# Altium PCB Expand_Board.PcbDoc
Units mil, origin at the board's own origin, x right, y up, seen from the top; angles counter-clockwise.
Board outline 6000 x 4000 mil, 2 copper layers (Top Layer, Bottom Layer); 51 components, 44 nets, 214 pads, 35 vias.
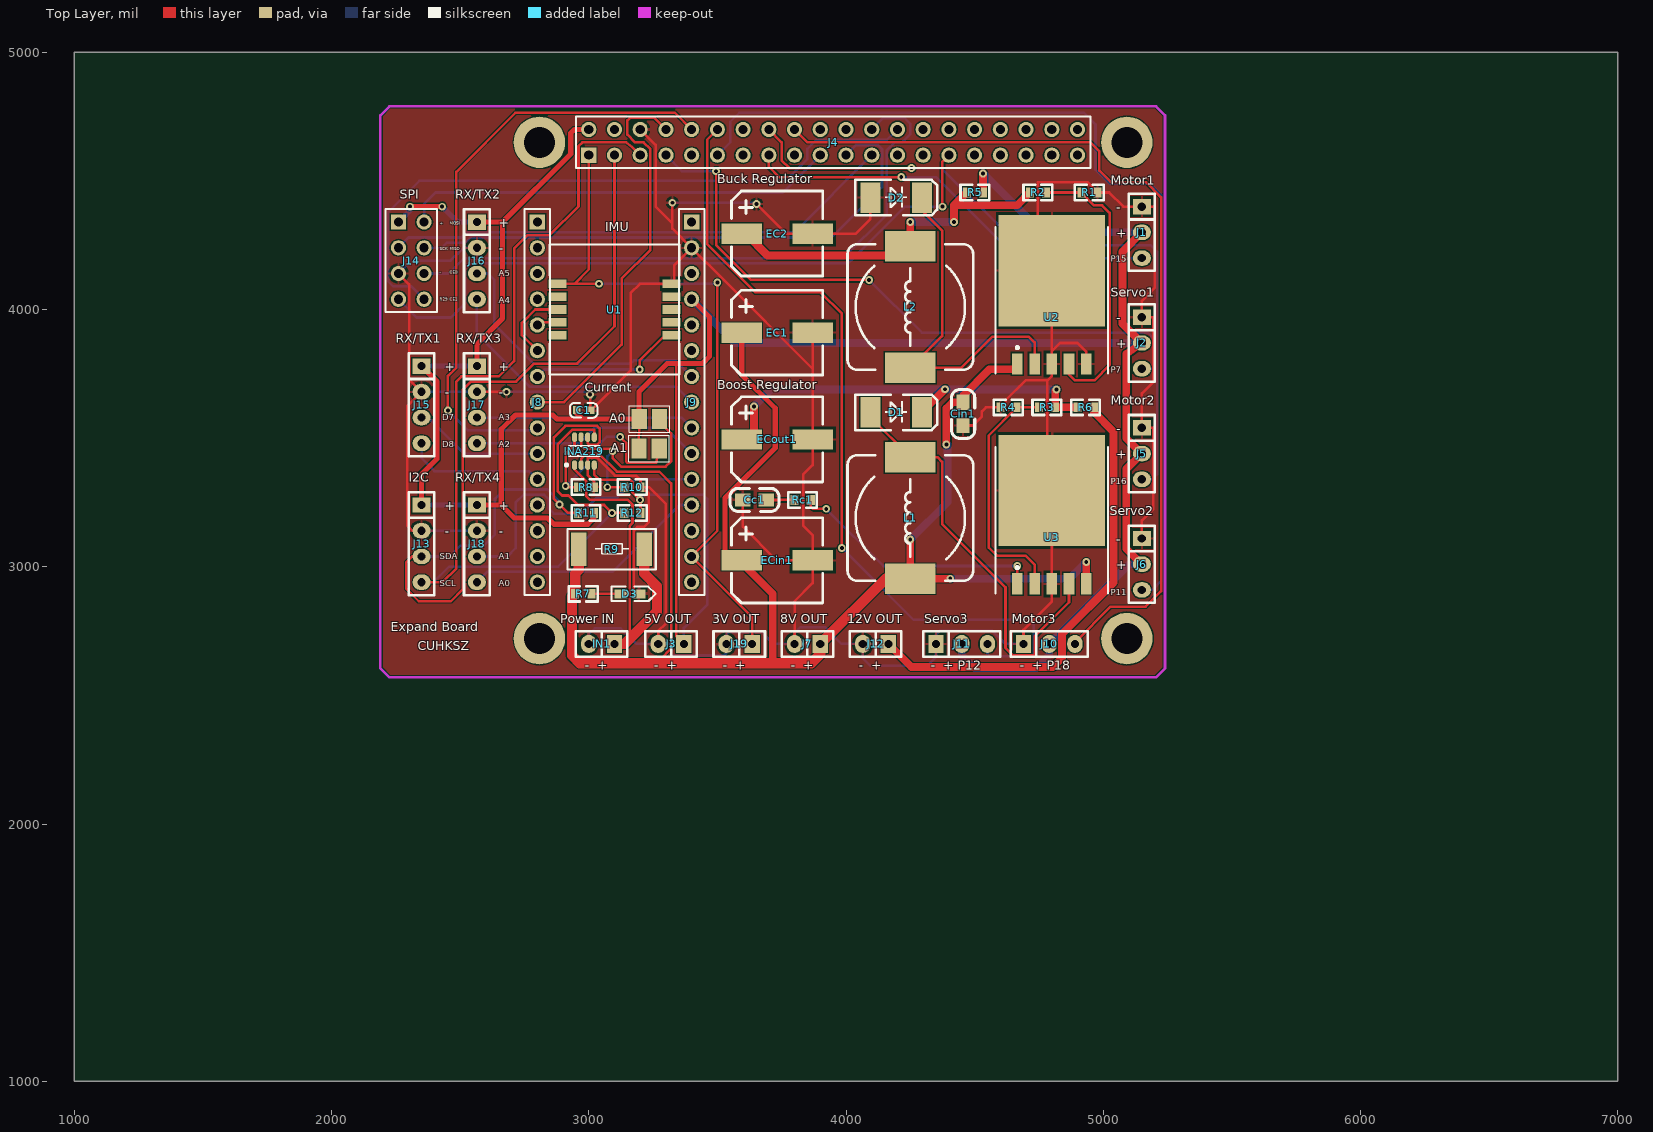
[diagram p0: Top Layer view]
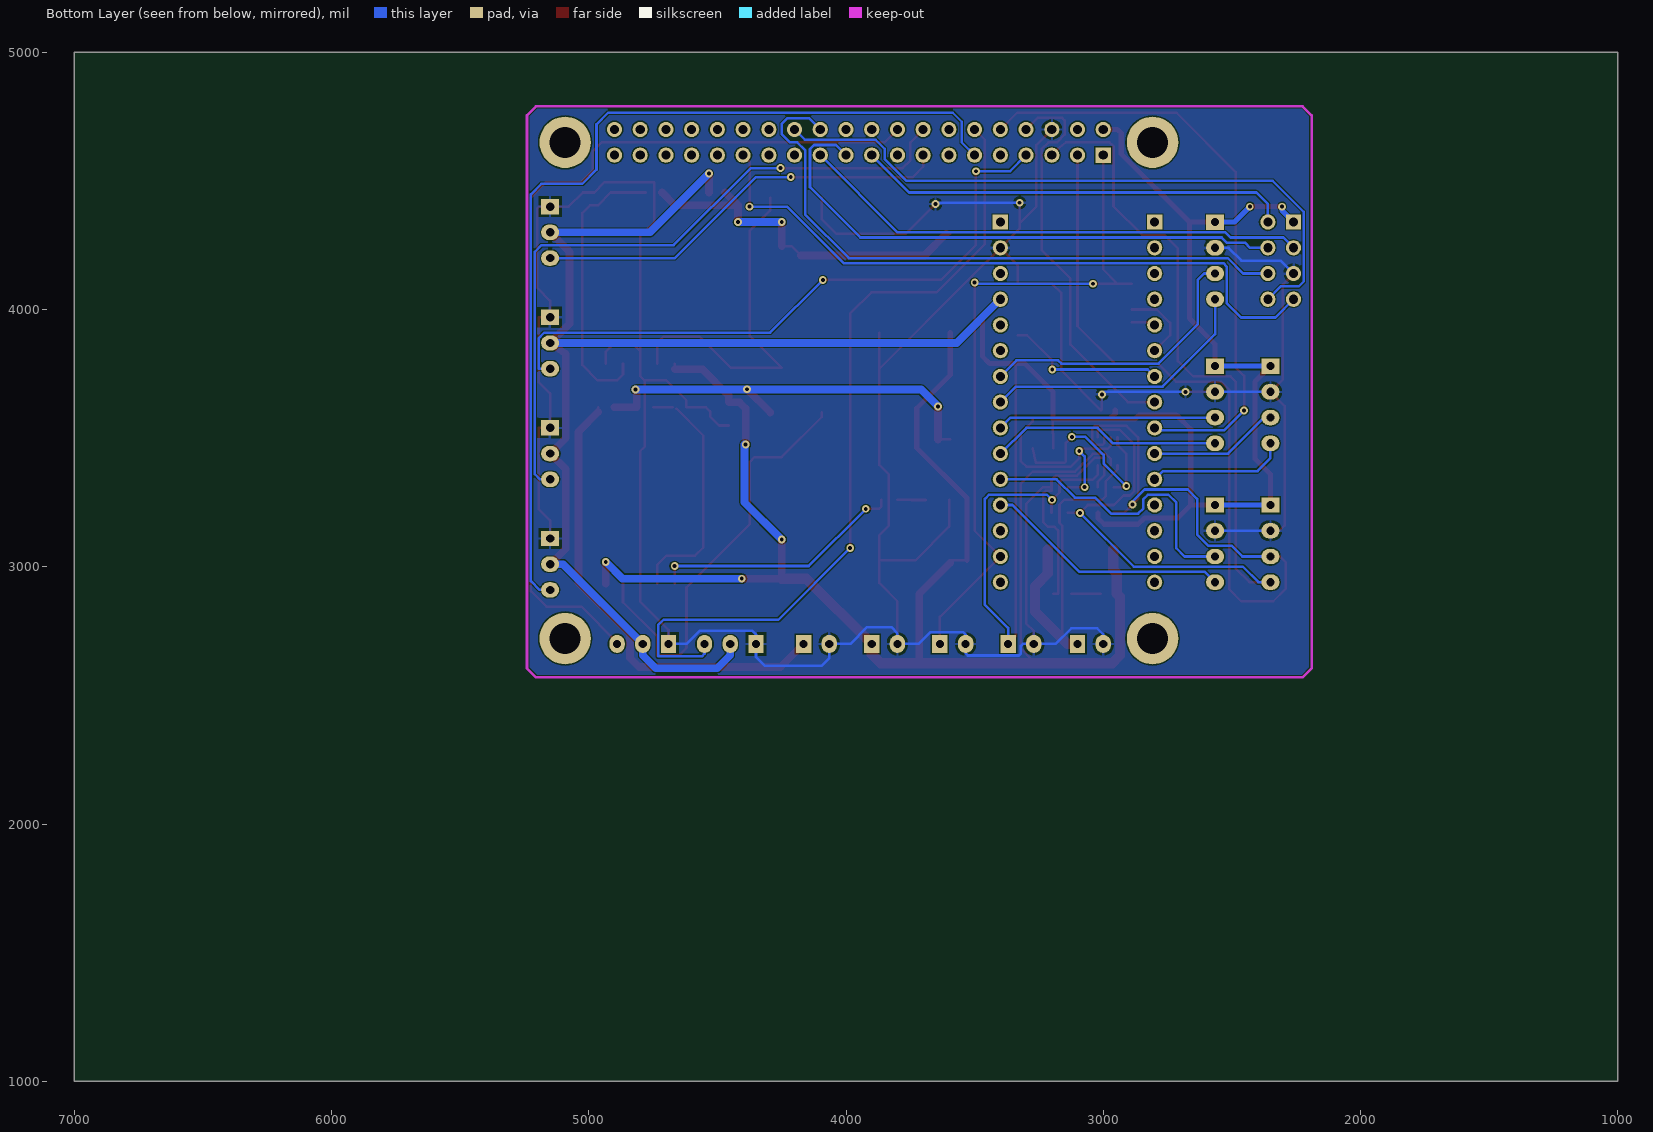
[diagram p1: Bottom Layer view, seen from below]

## Layer stack, top to bottom
Top Solder: solder mask 0.4, Solder Resist, Dk 3.5
Top Layer: signal copper 1.4
Dielectric 1: dielectric 12.6, FR-4, Dk 4.8
Bottom Layer: signal copper 1.4
Bottom Solder: solder mask 0.4, Solder Resist, Dk 3.5

## Board outline
1000,1000 7000,1000 7000,5000 1000,5000

## Design rules (kind name [scope] priority, off if disabled: settings)
Clearance [All] p1: gap=5
PolygonConnect [All] p1: connectstyle=Relief reliefconductorwidth=10 reliefentries=4 polygonreliefangle="90 Angle" airgapwidth=10
RoomDefinition Expand_Board [InComponentClass('Expand_Board')] p1: confinementstyle=ConfineIn formatcopy=TRUE lockcomponents=FALSE outline 2190,2570 5240,2570 5240,4790 2190,4790
RoutingVias [All] p1: holewidth=28 width=50 viastyle="Through Hole" minholewidth=28 minwidth=50 maxholewidth=28 maxwidth=50
SolderMaskExpansion [All] p1: expansion=4
Width [All] p1: maxlimit=50 minlimit=10 preferedwidth=10
30 further rules are at their usual default settings.

## Components (designator, comment, footprint, x,y, rotation, side; value= is the part's Value field where it differs from the comment)
A0 "Switch_A0" TSOP65P180X145-2N 3235.31,3574 r0 top
A1 "Switch_A1" TSOP65P180X145-2N 3234.37,3460 r0 top
C1 "CAP1uF" 0603C 2953.04,3609.39 r0 top
Cc1 "CAP0.47uF" 0805C 3600,3260 r0 top
Cin1 "CAP 0.1uF" 0805C 4455,3550 r90 top
D1 "DIODE SCHOTTKY 1N5820" SMA/DO-214AC 4100,3600 r0 top
D2 "DIODE 5A  40V" SMA/DO-214AC 4100,4435 r0 top
D3 "LED" LED-0603B 3125,2894.74 r0 top
EC1 "Cin 470uF 50V" SMD-EC8X8X10 3865,3915 r0 top
EC2 "Cout  220uF 35V" SMD-EC8X8X10 3865,4300 r0 top
ECin1 "SMD_ECAP  100uF   25V" SMD-EC8X8X10 3865,3030 r0 top
ECout1 "SMD_ECAP  680uF    16V" SMD-EC8X8X10 3865,3500 r0 top
IN1 "Power In" "Pin HDR1X2/2.54mm-S" 3100,2700 r270 top
INA219 "INA219" INA219 2983.04,3449.39 r90 top
J1 "Motor1" "Pin HDR1X3/2.54mm-S" 5150,4400 r0 top
J2 "Servo1" "Pin HDR1X3/2.54mm-S" 5150,3970 r0 top
J3 "Power 5V" "Pin HDR1X2/2.54mm-S" 3370,2700 r270 top
J4 "Raspberry Pi" "Pin HDR2X20/2.54mm-S" 3000,4600 r0 top
J5 "Motor2" "Pin HDR1X3/2.54mm-S" 5150,3540 r0 top
J6 "Servo2" "Pin HDR1X3/2.54mm-S" 5150,3110 r0 top
J7 "Power 8V" "Pin HDR1X2/2.54mm-S" 3900,2700 r270 top
J8 "Arduino 0~12" "Pin HDR1X15/2.54mm-S" 2800,4340 r270 top
J9 "Arduino 13~19" "Pin HDR1X15/2.54mm-S" 3400,4340 r270 top
J10 "Motor3" "Pin HDR1X3/2.54mm-S" 4690,2700 r90 top
J11 "Servo3" "Pin HDR1X3/2.54mm-S" 4350,2700 r90 top
J12 "Power 12V" "Pin HDR1X2/2.54mm-S" 4165,2700 r270 top
J13 "I2C" "Pin HDR1X4/2.54mm-S" 2350,3240 r0 top
J14 "SPI" "Pin HDR2X4/2.54mm-S" 2260,4340 r270 top
J15 "RX/TX1" "Pin HDR1X4/2.54mm-S" 2350,3780 r0 top
J16 "RX/TX2" "Pin HDR1X4/2.54mm-S" 2565,4340 r0 top
J17 "RX/TX3" "Pin HDR1X4/2.54mm-S" 2565,3780 r0 top
J18 "RX/TX4" "Pin HDR1X4/2.54mm-S" 2565,3240 r0 top
J19 "Small Power 3V" "Pin HDR1X2/2.54mm-S" 3635,2700 r270 top
L1 "INDUCTOR CD127-68UH 680" CDRH127 4250,3190 r90 top
L2 "INDUCTOR   68uH" CDRH127 4250,4010 r90 top
R1 "RES1k" 0603R 4915,4455 r0 top
R2 "RES 10k" 0603R 4715,4455 r0 top
R3 "RES 48.7k" 0603R 4750,3620 r0 top
R4 "RES  5.62k" 0603R 4600,3620 r0 top
R5 "RES 0Ω" 0603R 4470,4455 r0 top
R6 "RES 0Ω" 0603R 4900,3620 r0 top
R7 "RES 800" 0603R 3010,2895 r180 top
R8 "RES10k" 0603R 2958.04,3309.39 r0 top
R9 "RES0.1" 2512R 3213.04,3069.39 r180 top
R10 "RES10k" 0603R 3138.04,3309.39 r0 top
R11 "RES10k" 0603R 2958.04,3209.39 r0 top
R12 "RES10k" 0603R 3138.04,3209.39 r0 top
Rc1 "RES 2k" 0603R 3800,3260 r0 top
U1 "HI219M_IMU" SON127P1220X265-10N 3100,4000 r0 top
U2 "LM2596S-ADJ" TO-263-5 4800,3955 r0 top
U3 "LM2587S-ADJ" TO-263-5 4800,3100 r0 top

## Footprints (in the part's own frame and the unit in brackets; to place one, negate y for a bottom-side part, rotate by r counter-clockwise, add the part's x,y. Pads: shape width x height; smd on the part's side, far side on the other; paste and mask are expansions set on the pad)
0603C [mil]
  rect 30x30 smd: 1(0.21,-0.35) 2(55.21,-1.35)
  silkscreen extent -26,-30 81,28, body extent -1,-15 62,17, height 12
0603R [mm]
  rect 0.8x0.965 smd: 1(0,0) 2(1.6,0)
  silkscreen extent -0.64,-0.76 2.21,0.76, body extent -0.04,-0.41 1.56,0.41, height 0.45
0805C [mil]
  rect 60x50 smd: 1(-0.71,-0.4) 2(89.29,-0.4)
  silkscreen extent -51,-45 139,45, body extent 6,-25 84,25, height 31
2512R [mil]
  rect 61x129.92 smd: 1(-3.11,2) 2(251.89,2)
  silkscreen extent -47,-77 296,81, body extent 0,-63 249,63, height 24
CDRH127 [mm] "12*12*8mm（长宽高）"
  rect 3x5 smd: 1(-6,0) 2(6,0)
  silkscreen extent -6.2,-6.2 6.2,6.2, body extent -5.87,-6.03 6.13,5.97, height 7.8
INA219 [mm] "TSOP, 8-Leads, Body 2.90x1.60mm, Pitch 0.65mm, IPC Medium Density"
  oval 0.95x0.5 smd: 1(-1.375,0.975) 2(-1.375,0.325) 3(-1.375,-0.325) 4(-1.375,-0.975) 5(1.375,-0.975) 6(1.375,-0.325) 7(1.375,0.325) 8(1.375,0.975)
  silkscreen extent -1.5,-1.5 0.5,1.9, body extent -0.9,-1.5 0.9,1.5, height 1.45
LED-0603B [mil]
  rect 50x35 smd: A(0,0.26) K(70,0.26)
  silkscreen extent -36,-28 135,28, body extent 4,-15 66,17, height 24
"Pin HDR1X2/2.54mm-S" [mil]
  rect 70x60 hole 32: 1(0,0)
  oval 70x60 hole 32: 2(0,-100)
  silkscreen extent -50,-150 50,50, body extent -50,-150 50,50, height 336
"Pin HDR1X3/2.54mm-S" [mil]
  rect 70x60 hole 32: 1(0,0)
  oval 70x60 hole 32: 2(0,-100) 3(0,-200)
  silkscreen extent -50,-250 50,50, body extent -50,-250 50,50, height 336
"Pin HDR1X4/2.54mm-S" [mil]
  rect 70x60 hole 32: 1(0,0)
  oval 70x60 hole 32: 2(0,-100) 3(0,-200) 4(0,-300)
  silkscreen extent -50,-350 50,50, body extent -50,-350 50,50, height 336
"Pin HDR1X15/2.54mm-S" [mm] "Connector; Header; 15 Position"
  rect 1.5x1.5 hole 0.9: 1(0,0)
  round 1.5 hole 0.9: 2(2.54,0) 3(5.08,0) 4(7.62,0) 5(10.16,0) 6(12.7,0) 7(15.24,0) 8(17.78,0) 9(20.32,0) 10(22.86,0) 11(25.4,0) 12(27.94,0) 13(30.48,0) 14(33.02,0) 15(35.56,0)
  silkscreen extent -1.27,-1.27 36.83,1.27, body extent -1.27,-1.27 36.83,1.27, height 7.58
"Pin HDR2X4/2.54mm-S" [mm] "Connector; Header; 4x2 Position"
  rect 1.5x1.5 hole 0.9: 1(0,0)
  round 1.5 hole 0.9: 2(0,2.54) 3(2.54,0) 4(2.54,2.54) 5(5.08,0) 6(5.08,2.54) 7(7.62,0) 8(7.62,2.54)
  silkscreen extent -1.27,-1.27 8.89,3.81, body extent -1.27,-1.27 8.89,3.81, height 7.58
"Pin HDR2X20/2.54mm-S" [mm] "Connector; Header; 20x2 Position"
  rect 1.5x1.5 hole 0.9: 1(0,0)
  round 1.5 hole 0.9: 2(0,2.54) 3(2.54,0) 4(2.54,2.54) 5(5.08,0) 6(5.08,2.54) 7(7.62,0) 8(7.62,2.54) 9(10.16,0) 10(10.16,2.54) 11(12.7,0) 12(12.7,2.54) 13(15.24,0) 14(15.24,2.54) 15(17.78,0) 16(17.78,2.54) 17(20.32,0) 18(20.32,2.54) 19(22.86,0) 20(22.86,2.54) 21(25.4,0) 22(25.4,2.54) 23(27.94,0) 24(27.94,2.54) 25(30.48,0) 26(30.48,2.54) 27(33.02,0) 28(33.02,2.54) 29(35.56,0) 30(35.56,2.54) 31(38.1,0) 32(38.1,2.54) 33(40.64,0) 34(40.64,2.54) 35(43.18,0) 36(43.18,2.54) 37(45.72,0) 38(45.72,2.54) 39(48.26,0) 40(48.26,2.54)
  silkscreen extent -1.27,-1.27 49.53,3.81, body extent -1.27,-1.27 49.53,3.81, height 7.58
SMA/DO-214AC [mm] "塑封二极管"
  rect 2x3 smd: A(-0.127,0) K(4.953,0)
  silkscreen extent -1.63,-1.75 6.48,1.75, body extent 0.11,-1.35 4.71,1.35, height 2.4
SMD-EC8X8X10 [mm]
  rect 4x2 smd: 1(-6.858,-0.127) 2(0.142,-0.127)
  silkscreen extent -7.88,-4.32 1.12,4.08, body extent -8.38,-4.28 1.52,4.02, height 10.2
SON127P1220X265-10N [mm] "SON, 10-Leads, Body 12.25x12.25mm, Pitch 1.27mm, IPC Medium Density"
  rect 1.8x0.85 smd: 1(-5.63,2.54) 2(-5.63,1.27) 3(-5.63,0) 4(-5.63,-1.27) 5(-5.63,-2.54) 6(5.63,-2.54) 7(5.63,-1.27) 8(5.63,0) 9(5.63,1.27) 10(5.63,2.54)
  silkscreen extent -6.4,-6.4 6.4,6.4, body extent -6.25,-6.25 6.25,6.25, height 2.65
TO-263-5 [mm] "贴片LM2596"
  rect 1.05x2.1 smd: 1(-3.4,-4.225) 2(-1.7,-4.225) 3(0,-4.225) 4(1.7,-4.225) 5(3.4,-4.225)
  rect 10.5x11 smd: 6(0,4.987)
  silkscreen extent -5.55,-5.18 5.55,9.28, body extent -5.33,-4.7 5.33,10.29, height 3
TSOP65P180X145-2N [mm] "TSOP, 2-Leads, Body 1.00x0.15mm, Pitch 0.65mm, IPC Medium Density"
  rect 1.5x2 smd: 1(-1,0) 2(1,0)
  silkscreen extent -2,-1.3 2,1.3

## Part data
A0 A1 U1: library part Component_1
C1 Cc1 Cin1: library part CAP, "无极性电容"
D1 D2: library part "DIODE SCHOTTKY", "肖特基二极管"
EC1 EC2 ECin1 ECout1: library part SMD_ECAP, "贴片电解电容"
IN1 J3 J7 J12 J19: library part "Pin HDR1X2"
J1 J2 J5 J6 J10 J11: library part "Pin HDR1X3"
J4: library part "Pin HDR2X20"
J8 J9: library part "Pin HDR1X15"
J13 J15 J16 J17 J18: library part "Pin HDR1X4"
J14: library part "Pin HDR2X4"
L1 L2: library part INDUCTOR, "INDUCTOR"
R1 R2 R3 R4 R5 R6 R7 R8 R9 R10 R11 R12 Rc1: library part RES
U2: "可调稳压芯片"
U3: library part LM2577S-ADJ, "DC升压"

## Free pads (board coordinates)
  round 200 hole 120: 0(2808.27,2720.87) 0(2808.27,4650) 0(5091.73,2720.87) 0(5091.73,4650)

## Via types
v1: diameter 30, hole 15, Top Layer to Bottom Layer, 35 vias

## Nets (pads, with @x,y where several pads share a name; then routed paths per layer and width w, separated by ;. In a path a pad name is that pad's centre, name@x,y a point inside that pad or via, vN(x,y) a via of type N, cw(c..) or ccw(c..) an arc to the next point about the centre after c; other vN are vias at no path point)
A0: A0.2 INA219.7 R10.1 | length 838.8
  Top Layer w10: INA219.7 2970.24,3471.01 2983.25,3458 3085,3458 v1(3093,3450) 3093,3422 3125.87,3389.13 3299.13,3389.13 3320,3410 3320,3518.69 3274.69,3564 A0.2 ; v1(3072.39,3309.39) R10.1
  Bottom Layer w10: v1(3072.39,3309.39) 3072.39,3429.39 v1(3093,3450)
A1: A1.2 INA219.8 R8.1 | length 845
  Top Layer w10: INA219.8 2944.65,3472.5 2910,3437.85 v1(2910,3313.79) 2914.39,3309.39 R8.1 ; v1(3122,3505) 3145,3482 3145,3410 3150,3405 3262.89,3405 A1.2
  Bottom Layer w10: v1(2910,3313.79) 2910.79,3313.79 2998.71,3401.71 2998.71,3434.63 3069.09,3505 v1(3122,3505)
CE0: J4.24 J14.6 | length 2477.1
  Bottom Layer w10: J14.6 2456,4140 2516,4200 3989,4200 4159,4370 4159,4619.47 4189.53,4650 4217.53,4650 4250,4682.47 4250,4721 4227,4744 4144,4744 J4.24
CE1: J4.26 J14.8 | length 2573.4
  Bottom Layer w10: J14.8 2310,4090 2240,4090 2220.47,4109.53 2220.47,4379.53 2340.94,4500 3764,4500 3850,4586 3850,4625 3885,4660 4160,4660 J4.26
GND: C1.2 Cc1.1 Cin1.1 D2.A D3.K EC1.2 EC2.2 ECin1.2 ECout1.2 IN1.2 INA219.3 J1.1 J2.1 J3.2 J4.6 J5.1 J6.1 J7.2 J9.2 J10.1 J11.1 J12.2 J13.2 J14.5 J15.2 J16.2 J17.2 J18.2 J19.2 R1.2 R4.1 R8.2 R10.2 U1.10 U2.3 U2.5 U2.6 U3.3 U3.6 | length 15384.4
  Top Layer w10: J14.5 2302,4098 2302,3728 J15.2 2295,3625 2295,3160 2315,3140 J13.2 ; J17.2 v1(2680,3680) ; v1(3005,3670) 3005,3611.29 C1.2 3163,3762.79 3163,4064 3199,4100 U1.10 3331.65,4100 3331.65,4171.65 J9.2 ; R8.2 3021.03,3330.8 2995.84,3356 2995.84,3422.38 2997.42,3423.96 3032,3423.96 3101.96,3354 3184.03,3354 3201.03,3337 R10.2 ; D3.K 3175,2895 3175,3141 3189,3155 3215,3155 3234,3174 3234,3285.4 3224,3295.4 3201.03,3295.4 R10.2 ; J4.6 3260,4640 3260,4400 3325,4335 ; J3.2 3270,2750 3300,2780 3300,3243.39 3234,3309.39 R10.2 ; v1(3325,4415) 3325,4335 ; Cc1.1 3599.29,3155.71 3730,3025 ECin1.2 ; v1@3650,4412 v1(3652,4410) 3767,4295 EC2.2 4038,4295 4095,4352 D2.A ; J7.2 3800,2866 3870.59,2936.59 ECin1.2 ; 3870.59,3774.41 EC1.2 ; Cin1.1 4493.29,3549.29 4528,3584 4528,3604 4544,3620 R4.1 4621,3620 4621,3648 4698,3725 4783,3725 4800,3740.7 ; J10.1 4690,2755 4800,2865 U3.3 U3.6 4800,3449 4783,3466 4783,3723.7 4800,3740.7 ; U2.5 4933.86,3836.14 4900,3870 4832,3870 4800,3838 ; J6.1 5150,3180 5195,3225 5195,3540 J5.1 5150,3674 5195,3719 5195,3970 J2.1 5150,4034 5201,4085 5201,4392 5193,4400 J1.1 5078,4400 5023,4455 R1.2 4937.99,4495 4745,4495 4745,4341 4800,4286 U2.6 4800,3838 ; 3325,4335 3325,4315 J9.2 ; J9.2 3510,4130 3510.36,4130 3870.59,3769.77 3870.59,3395.59 3833,3358 3833,3160.59 3870.59,3123 ECin1.2 ; 4800,3740.7 U2.3 4800,3838
  Bottom Layer w10: J14.5 2310,4190 2463,4190 2513,4240 J16.2 ; J13.2 J18.2 ; J15.2 J17.2 ; v1(2680,3680) 2995,3680 v1(3005,3670) ; IN1.2 3000,2737 3024,2761 3124,2761 3185,2700 J3.2 3312,2700 3320,2692 3320,2663 3328,2655 3526,2655 3535,2664 J19.2 3535,2736 3544,2745 3673,2745 3718,2700 J7.2 3800,2741 3824,2765 3918,2765 3983,2700 J12.2 4065,2645 4095,2615 4315,2615 4350,2650 J11.1 4350,2736 4366,2752 4568,2752 4620,2700 J10.1 ; v1(3325,4415) 3647,4415 v1(3652,4410)
MISO: J4.21 J14.4 | length 2188.6
  Bottom Layer w10: J14.4 2429,4240 2449,4260 2520,4260 2540,4280 3944,4280 4140,4476 4140,4624 4124.47,4639.53 4039.53,4639.53 J4.21
MOSI: J4.19 J14.2 | length 1688.7
  Bottom Layer w10: J14.2 2360,4410 2405,4455 3755,4455 J4.19
MOTOR1: J1.3 J4.15 | length 1642
  Top Layer w10: J4.15 3700,4555 3740,4515 v1(4215,4515)
  Bottom Layer w10: v1(4215,4515) 4350,4515 4665,4200 J1.3
MOTOR2: J4.16 J5.3 | length 2680.5
  Top Layer w10: J4.16 3750,4650 3750,4580 3780,4550 v1(4255,4550)
  Bottom Layer w10: v1(4255,4550) 4370,4550 4670,4250 5184,4250 5210,4224 5210,3360 5190,3340 J5.3
MOTOR3: J4.18 J10.3 | length 3532.7
  Top Layer w10: J4.18 3850,4650 4950,4650 4985,4615 4985,4540 5030,4495 5166,4495 5225,4436 5225,2905 5165,2845 5029,2845 4890,2706 J10.3
NetCc1_2: Cc1.2 Rc1.1 | length 110.9
  Top Layer w10: Cc1.2 3744,3259.6 3744.4,3260 Rc1.1
NetD1_A: D1.A L1.2 U3.4 | length 1654
  Top Layer w10: D1.A 4095,3581.22 L1.2 4355.78,3426.22 4374,3408 4374,3166 4620,2920 4620,2685 4650,2655 4733,2655 4733,2728.07 4866.93,2862 U3.4
NetD2_K: D2.K L2.1 U2.2 | length 1371
  Top Layer w10: D2.K 4295,4385 4373.43,4306.57 4373.43,3897.21 L2.1 4448.78,3773.78 4570,3895 4710.07,3895 4733.07,3872 U2.2
NetD3_A: D3.A R7.1 | length 115
  Top Layer w10: R7.1 D3.A
NetR1_1: R1.1 R2.2 U2.4 | length 1104.4
  Top Layer w10: R2.2 R1.1 4965,4405 4996,4405 5025,4376 5025,3784 4966,3725 4890,3725 4866.93,3748.07 U2.4
NetR3_1: R3.1 R4.2 U3.2 | length 939.7
  Top Layer w10: R4.2@4659.81,3614.81 4555,3510 4555,3075 4586.38,3043.62 4697.45,3043.62 4733.07,3008 U3.2 ; R4.2@4673.66,3620 R3.1
NetRc1_2: Rc1.2 U3.1 | length 994.2
  Top Layer w10: Rc1.2 3862.99,3234.01 3872,3225 v1(3923,3225) ; U3.1 v1(4666.14,3003)
  Bottom Layer w10: v1(3923,3225) 4145,3003 v1(4666.14,3003)
RST_IMU: J8.7 U1.6 | length 618.4
  Top Layer w10: v1(3198,3767) 3198,3802 3296,3900 U1.6@3331.65,3900
  Bottom Layer w10: J8.7 2827,3767 v1(3198,3767)
RST_SPI: J4.29 J14.7 | length 2616.5
  Top Layer w10: v1(4375,4400) 4375,4575 J4.29
  Bottom Layer w10: J14.7 2331,3969 2464,3969 2520,4025 2520,4167 2533,4180 4009,4180 4229,4400 v1(4375,4400)
RX1: J8.11 J15.4 | length 542
  Bottom Layer w10: J15.4 2350,3422 2400,3372 2768,3372 J8.11
RX2: J9.8 J16.4 | length 1100.4
  Bottom Layer w10: J16.4 2565,3904 2769,3700 3340,3700 J9.8 J9.8@3420,3640
RX3: J9.10 J17.4 | length 921.3
  Bottom Layer w10: J17.4 2962,3480 3022,3540 3298.69,3540 3398.69,3440 J9.10 J9.10@3420,3440
RX4: J9.12 J18.4 | length 979.3
  Bottom Layer w10: J18.4 2605,2980 3093,2980 3353,3240 J9.12 J9.12@3420,3240
RXD_IMU: J8.6 U1.3 | length 302.7
  Top Layer w10: J8.6 2740,3900 2740,3948 2792,4000 U1.3@2888.35,4000
RXD_PI: J4.10 J8.9 | length 2361.9
  Top Layer w10: v1(2452.5,3607.5) 2452.5,3742.5 2485,3775 2485,4535 2715,4765 3335,4765 J4.10
  Bottom Layer w10: v1(2452.5,3607.5) 2530,3530 2790,3530 J8.9
SCL: INA219.5 J4.5 J13.4 R12.1 | length 3919.8
  Top Layer w10: J13.4 2432,2940 2485,2993 2485,3719.78 2505.22,3740 2650,3740 2710,3800 2710,4237 2762,4289 2848,4289 2960,4401 2960,4635 2975,4650 3145.47,4650 3167.74,4632.26 J4.5 ; INA219.5 3021.43,3533 2936,3533 2879,3476 2879,3294 2896,3277 2921.08,3277 2958.08,3240 3059.39,3240 v1(3090,3209.39) R12.1
  Bottom Layer w10: J13.4 2397,2940 2457,3000 2880.61,3000 v1(3090,3209.39)
SCLK: J4.23 J14.3 | length 1989.1
  Bottom Layer w10: J14.3 2300,4280 2505,4280 2525,4300 3800,4300 J4.23
SDA: INA219.6 J4.3 J13.3 R11.1 | length 4006.9
  Top Layer w10: J13.3 2313,3040 2290,3017 2290,2915 2339,2866 2464,2866 2510,2912 2510,3688 2542,3720 2718,3720 2788,3790 2955,3790 3100,3935 J4.3 ; R11.1 2918.61,3209.39 v1(2886,3242) 2864,3264 2864,3503 2909,3548 3032,3548 3042,3538 3042,3484 3032,3474 3002.84,3474 2995.84,3481 INA219.6
  Bottom Layer w10: J13.3 2459,3040 2501,3082 2592,3082 2635,3125 2635,3264 2671.47,3300.47 2839.53,3300.47 2886,3254 v1(2886,3242)
SERVO1: J2.3 J4.7 | length 2521.3
  Top Layer w10: v1(3495,4537.5) 3495,4250 3630,4115 v1(4090,4115)
  Bottom Layer w10: J4.7 3362.5,4537.5 v1(3495,4537.5) ; v1(4090,4115) 4295,3910 5173,3910 5195,3888 5195,3770 J2.3
SERVO2: J4.11 J6.3 | length 3667.7
  Bottom Layer w10: J4.11 3550,4650 3550,4730 3585,4765 4925,4765 4970,4720 4970,4544 5025,4489 5184,4489 5225,4448 5225,2944 5191,2910 J6.3
SERVO3: J4.12 J11.3 | length 3222.2
  Top Layer w10: J4.12 3460,4660 3460,4255 3648,4067 3901,4067 3984,3984 v1(3984,3073)
  Bottom Layer w10: v1(3984,3073) 4263,2794 4709,2794 4730,2773 4730,2652 4560,2652 4550,2662 J11.3
TX1: J8.10 J15.3 | length 508
  Bottom Layer w10: J15.3 2375,3580 2515,3440 J8.10
TX2: J9.7 J16.3 | length 1132.5
  Bottom Layer w10: J16.3 2608,4140 2633,4115 2633,3942 2785,3790 3163,3790 3175.61,3802.61 3337.39,3802.61 J9.7 J9.7@3420,3740
TX3: J9.9 J17.3 | length 871.6
  Bottom Layer w10: J17.3 3360,3580 J9.9 J9.9@3420,3540
TX4: J9.11 J18.3 | length 1164.6
  Bottom Layer w10: J18.3 2683.47,3040 2715.47,3072 2715.47,3248.94 2746.53,3280 2826.69,3280 2843.85,3262.84 2843.85,3226.93 2864,3206.79 2969.39,3206.79 3031.35,3268.75 3110,3268.75 3181.25,3340 J9.11 J9.11@3420,3340
TXD_IMU: J8.5 U1.4 | length 92.5
  Top Layer w10: J8.5 2810,3950 U1.4@2888.35,3950
TXD_PI: J4.8 J8.8 | length 1567.5
  Top Layer w10: J8.8 2904,3640 3128,3864 3128,4120 3239.53,4231.53 3239.53,4624 3213.53,4650 3180,4650 3150,4680 3150,4735 3160,4745 3255,4745 J4.8
VCC_3V: J4.1 J9.14 J19.1 U1.1 | length 2680.7
  Top Layer w10: U1.1@2888.35,4100 2944,4100 ; J4.1 3000,4156 2944,4100 ; v1(3040,4100) 2944,4100 ; v1(3500,4105) 3500,3140 J9.14 3635,2805 J19.1
  Bottom Layer w10: v1(3040,4100) 3040.47,4100.47 3495.47,4100.47 v1(3500,4105)
VCC_5V: A0.1 A1.1 C1.1 INA219.4 J1.2 J2.2 J3.1 J4.2 J5.2 J6.2 J9.4 J10.2 J11.2 J13.1 J14.1 J15.1 J16.1 J17.1 J18.1 R5.2 R11.2 R12.2 | length 12167.7
  Top Layer w10: INA219.4 3021.43,3357.57 3040,3339 3160,3339 3170,3329 3170,3289 v1(3199,3260) 3201.03,3257.97 R12.2 ; A1.1 3195,3516 3195.94,3516.94 A0.1 ; 3340,3790 3340,2730 J3.1
  Top Layer w20: v1(2305,4400) v1(2430,4400) ; J13.1 2350,3360 2410,3420 2410,3720 J15.1 ; J18.1 2660,3240 ; J17.1 2565,3865 2665,3965 2665,4340 2930,4605 2930,4686 2944,4700 J4.2 ; J16.1 2664,4340 ; C1.1 2953.25,3596.75 2976,3574 ; R11.2 3021.03,3189.82 2996.21,3165 2865,3165 2840,3190 2710,3190 2660,3240 ; 3340,3790 3305,3790 3195.94,3680.94 A0.1 2976,3574 ; 3345,3790 3442,3790 3470,3818 3470,3970 J9.4 ; 2660,3240 2660,3535 2715,3590 2860,3590 2876,3574 2976,3574
  Top Layer w30: R5.2 v1(4532.99,4529) ; J6.2 5090,3070 5090,3380 J5.2 5090,3500 5090,3827 J2.2 5075,3945 5075,4225 J1.2
  Bottom Layer w10: v1(3199,3260) 3219,3280 3444,3280 3460,3264 3460,2852 3370,2762 J3.1
  Bottom Layer w20: J14.1 2305,4385 v1(2305,4400) ; J13.1 J18.1 ; J15.1 J17.1 ; v1(2430,4400) 2490,4340 J16.1
  Bottom Layer w30: J9.4 3570,3870 J2.2 ; J11.2 4450,2656 4501,2605 4739,2605 4790,2656 J10.2 5100,3010 J6.2 ; v1(4532.99,4529) 4761.99,4300 J1.2
VCC_8V: Cin1.2 EC1.1 ECin1.1 INA219.2 J7.1 L1.1 R7.2 R9.2 U2.1 U3.5 | length 6468.2
  Top Layer w10: INA219.2 2970.24,3419 2990.24,3439 3040.57,3439 3109.57,3370 3274,3370 3320,3324 3320,2682 3278,2640 ; ECin1.1@3530,3025 ECin1.1 ECin1.1@3595,3015 ; U2.1@4666.14,3768 U2.1
  Top Layer w20: ECin1.1@3530,3025 3530,3267 3725,3462 3725,3616 3595,3746 EC1.1
  Top Layer w30: ECin1.1@3595,3015 3715,2895 3715,2625 ; v1(4250,3106) L1.1 v1(4405,2953.78) ; v1(4390,3475) 4390,3615 4414.29,3639.29 Cin1.2 4455.4,3665.4 4558,3768 U2.1@4666.14,3768 ; U3.5 v1(4933.86,3018.86)
  Top Layer w40: R9.2 2961.15,2988.14 2947.01,2974 R7.2 2935,2882.99 2935,2655 2965,2625 3715,2625 3865,2625 3900,2660 J7.1 4153.78,2953.78 L1.1
  Bottom Layer w30: v1(4250,3106) 4395,3251 v1@4395,3475 ; v1(4405,2953.78) 4868.78,2953.78 v1(4933.86,3018.86)
VCC_12V: J12.1 R6.2 | length 1815.9
  Top Layer w10: R6.2@4962.99,3602.01 R6.2
  Top Layer w30: J12.1 4255,2610 4804,2610 4840,2646 4840,2739 5040,2939 5040,3525 R6.2@4962.99,3602.01
VCC_BOOST12V: D1.K ECout1.1 R3.2 R6.1 | length 1675
  Top Layer w10: ECout1.1 ECout1.1@3642,3495 ; v1@4812.99,3683.99 v1(4818,3689)
  Top Layer w30: ECout1.1@3642,3495 v1(3642,3623) ; D1.K v1(4385,3690) ; v1@4812.99,3683.99 R3.2 R6.1
  Bottom Layer w10: v1@4810,3697 v1(4818,3689)
  Bottom Layer w30: v1(3642,3623) 3708,3689 v1(4818,3689)
VCC_BUCK5V: EC2.1 L2.2 R2.1 R5.1 | length 1420.4
  Top Layer w10: EC2.1 EC2.1@3610,4295 ; L2.2@4174.78,4210 4211,4246.22 L2.2
  Top Layer w30: EC2.1@3610,4295 3695,4210 L2.2@4174.78,4210 ; L2.2 v1(4250,4340) ; v1(4420,4340) 4420,4405 ; R5.1 4420,4405 ; R2.1 4665,4405 4420,4405
  Bottom Layer w30: v1(4250,4340) v1(4420,4340)
VCC_IN: IN1.1 INA219.1 R9.1 | length 1338.3
  Top Layer w10: INA219.1 2944.65,3378.35 2990,3333 2990,3275 3005,3260 3152,3260 3170,3242 3170,3170 3160,3160 3160,2720
  Top Layer w40: IN1.1 3140,2700 3160,2720 3265,2825 3265,2925 3216.15,2973.85 R9.1
pads on no net: J4.4 J4.9 J4.13 J4.14 J4.17 J4.20 J4.22 J4.25 J4.27 J4.28 J4.30 J4.31 J4.32 J4.33 J4.34 J4.35 J4.36 J4.37 J4.38 J4.39 J4.40 J8.1 J8.2 J8.3 J8.4 J8.12 J8.13 J8.14 J8.15 J9.1 J9.3 J9.5 J9.6 J9.13 J9.15 U1.2 U1.5 U1.7 U1.8 U1.9

## Polygon pours and split planes (outlines as drawn)
GND on Top Layer "Top Layer-No Net" (solid, pour order 0): 2190,4790 5240,4790 5240,2570 2190,2570 2190,4790
GND on Bottom Layer "Top Layer-No Net" (solid, pour order 2): 2190,4790 5240,4790 5240,2570 2190,2570 2190,4790

## Keep-outs
Keep-Out Layer:
  lines w10: 2190,2605 2190,4755 2225,4790 5205,4790 5240,4755 5240,2605 5205,2570 2225,2570 2190,2605

## Silkscreen, mask and mechanical layers (free items; w line width, h text height)
Top Overlay:
  text "Buck Regulator" at 3500,4490 h36
  text "Motor1" at 5030,4485 h36
  text "SPI" at 2265,4430 h36
  text "RX/TX2" at 2480,4430 h36
  text "-" at 5050,4380 h36
  text "+" at 2420,4330 h12
  text "MOSI" at 2460,4330 h12
  text "+" at 2650,4320 h36
  text "IMU" at 3065,4305 h36
  text "+" at 5050,4280 h36
  text "SCK" at 2420,4230 h12
  text "MISO" at 2460,4230 h12
  text "-" at 2650,4220 h36
  text "P15" at 5030,4185 h24
  text "-" at 2420,4140 h12
  text "CE0" at 2460,4140 h12
  text "A5" at 2650,4130 h24
  text "Servo1" at 5030,4050 h36
  text "R29" at 2420,4035 h12
  text "CE1" at 2460,4035 h12
  text "A4" at 2650,4025 h24
  text "-" at 5050,3950 h36
  text "RX/TX1" at 2250,3870 h36
  text "RX/TX3" at 2485,3870 h36
  text "+" at 5050,3850 h36
  text "+" at 2440,3760 h36
  text "+" at 2650,3760 h36
  text "P7" at 5030,3755 h24
  text "Boost Regulator" at 3500,3690 h36
  text "Current" at 2985,3680 h36
  text "-" at 2440,3660 h36
  text "-" at 2650,3660 h36
  text "Motor2" at 5030,3630 h36
  text "D7" at 2430,3570 h24
  text "A3" at 2650,3570 h24
  text "-" at 5050,3520 h36
  text "D8" at 2430,3465 h24
  text "A2" at 2650,3465 h24
  text "+" at 5050,3420 h36
  text "I2C" at 2300,3330 h36
  text "RX/TX4" at 2480,3330 h36
  text "P16" at 5030,3320 h24
  text "+" at 2440,3220 h36
  text "+" at 2650,3220 h36
  text "Servo2" at 5025,3200 h36
  text "-" at 2440,3120 h36
  text "-" at 2650,3120 h36
  text "-" at 5050,3090 h36
  text "SDA" at 2420,3030 h24
  text "A1" at 2650,3030 h24
  text "+" at 5050,2990 h36
  text "SCL" at 2420,2925 h24
  text "A0" at 2650,2925 h24
  text "P11" at 5030,2890 h24
  text "Power IN" at 2890,2780 h36
  text "5V OUT" at 3215,2780 h36
  text "3V OUT" at 3480,2780 h36
  text "8V OUT" at 3745,2780 h36
  text "12V OUT" at 4005,2780 h36
  text "Servo3" at 4305,2780 h36
  text "Motor3" at 4645,2780 h36
  text "Expand Board" at 2230,2750 h36
  text "CUHKSZ" at 2335,2675 h36
  text "-  +" at 2985,2600 h36
  text "-  +" at 3255,2600 h36
  text "-  +" at 3520,2600 h36
  text "-  +" at 3785,2600 h36
  text "-  +" at 4050,2600 h36
  text "-  + P12" at 4330,2600 h36
  text "-  + P18" at 4675,2600 h36